# EAGLE board hw4 (EAGLE 9.6.2)
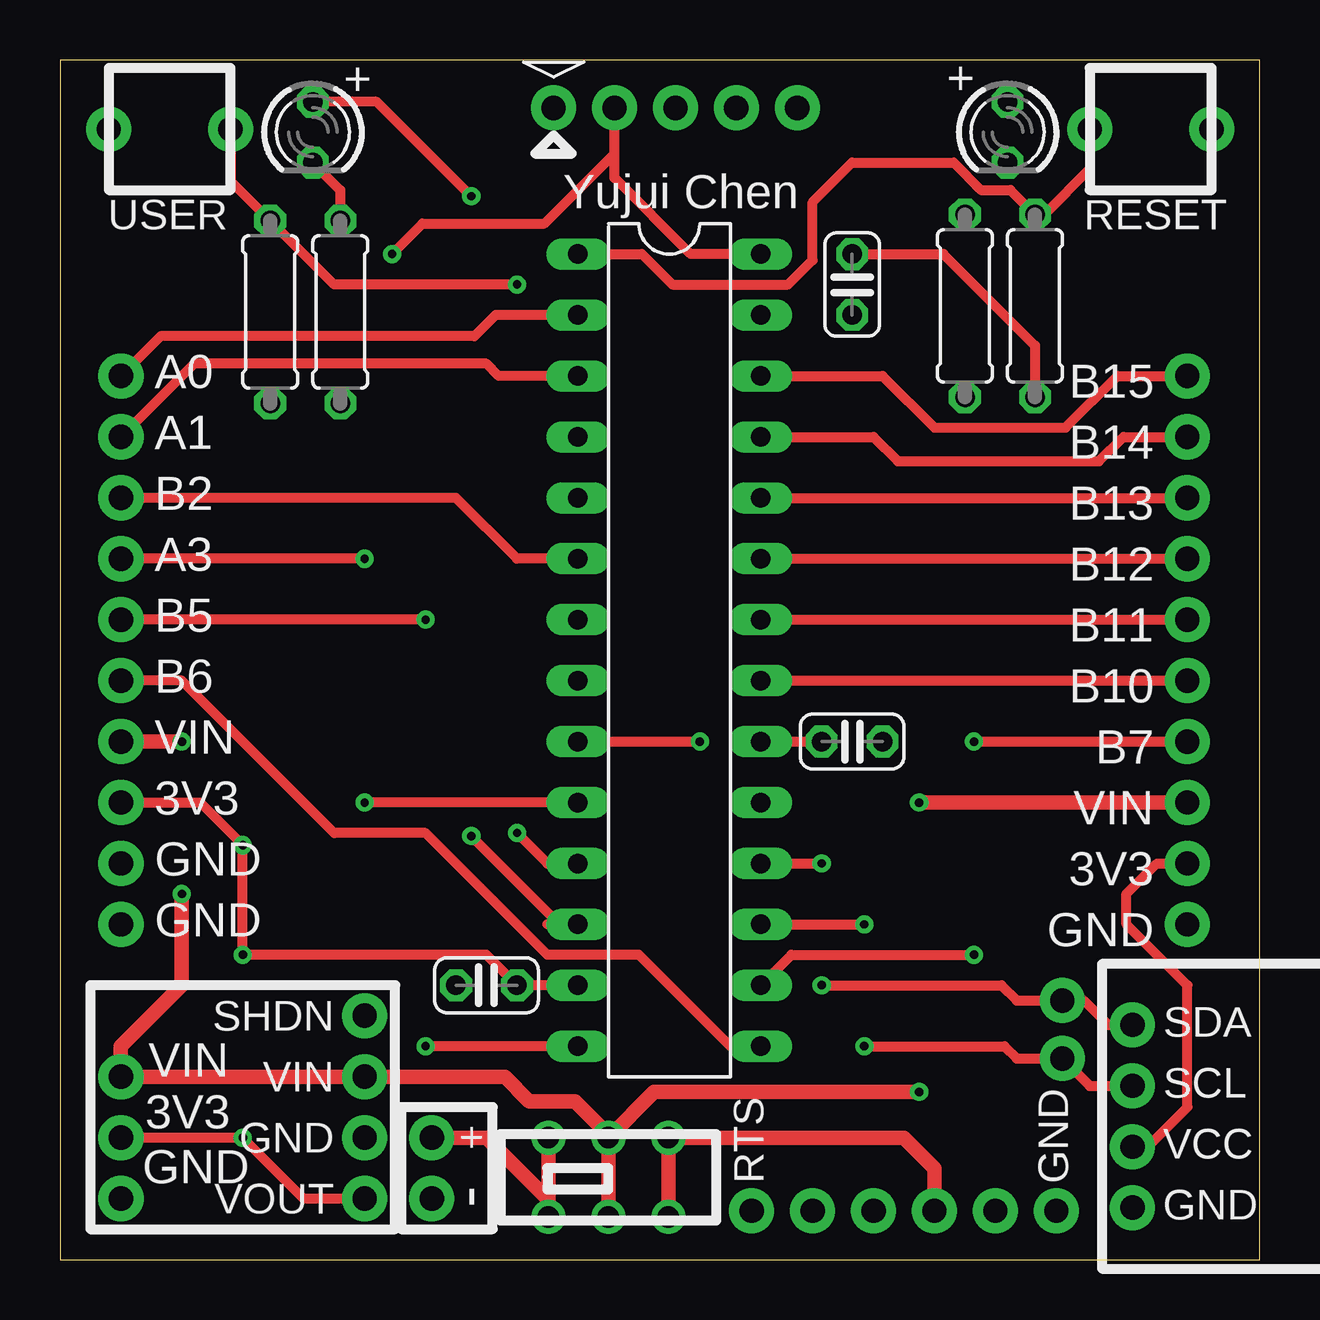
[diagram p0: board, top side]
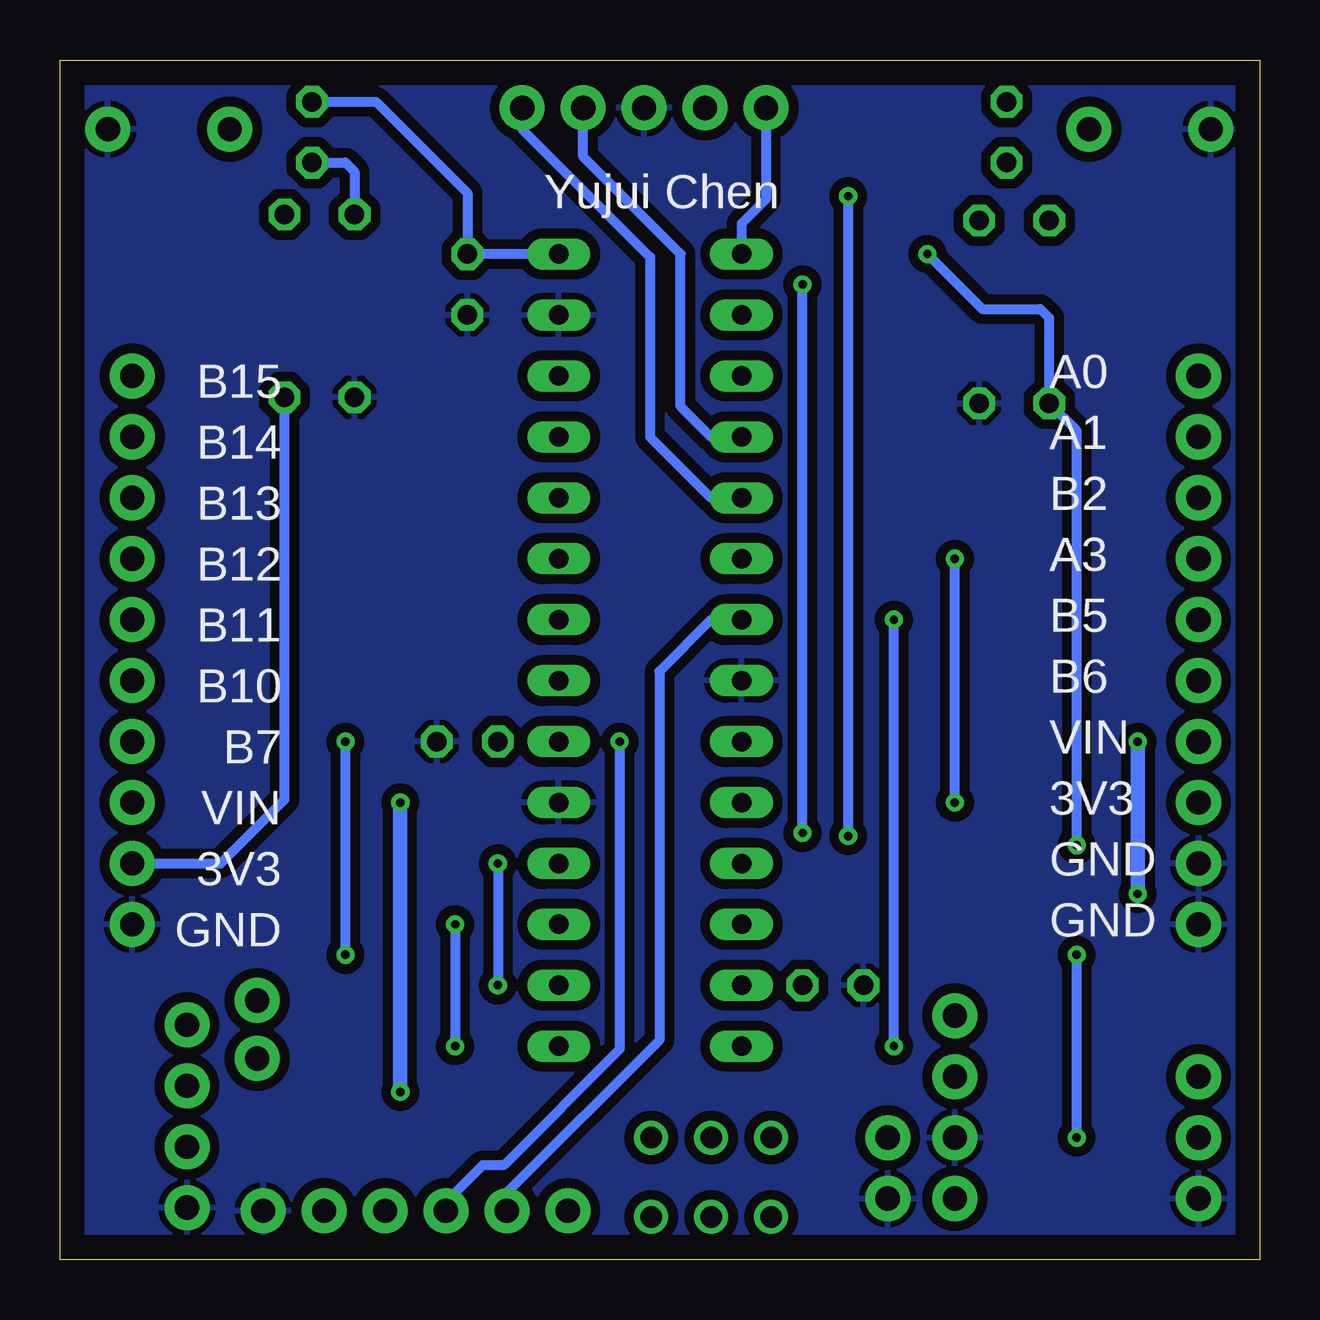
[diagram p1: board, bottom side, seen from below]

Size 50 x 50 mm. Coordinates in mm from the lower left corner, seen from the top.
Outline: 0,0 50,0 50,50 0,50 0,0
Copper layers (1*16): Top 0.035mm / dielectric 1.5mm / Bottom 0.035mm
Design rules "default": minimum track width 6mil, minimum drill 0.35mm, track to track 6mil, track to pad 6mil, pad to pad 6mil, via to via 6mil, smd to smd 6mil, copper to edge 40mil, drill to drill 6mil, minimum pad ring 10mil, minimum via ring 8mil, stop-mask expansion 4mil, vias tented up to drill 0mil, thermal gap 10mil

## Footprints (pad centres in the part's own frame; a part is rotated, then mirrored left to right if it is on the bottom)
C025-024X044 = drill 0.813 octagon: 1 -1.27,0; 2 1.27,0
LED3MM = drill 0.813 octagon: A -1.27,0; K 1.27,0
0207/7 = drill 0.813 octagon: 1 -3.81,0; 2 3.81,0
DIL28-3 = drill 0.813 long: 1 -16.51,-3.81; 2 -13.97,-3.81; 3 -11.43,-3.81; 4 -8.89,-3.81; 5 -6.35,-3.81; 6 -3.81,-3.81; 7 -1.27,-3.81; 8 1.27,-3.81; 9 3.81,-3.81; 10 6.35,-3.81; 11 8.89,-3.81; 12 11.43,-3.81; 13 13.97,-3.81; 14 16.51,-3.81; 15 16.51,3.81; 16 13.97,3.81; 17 11.43,3.81; 18 8.89,3.81; 19 6.35,3.81; 20 3.81,3.81; 21 1.27,3.81; 22 -1.27,3.81; 23 -3.81,3.81; 24 -6.35,3.81; 25 -8.89,3.81; 26 -11.43,3.81; 27 -13.97,3.81; 28 -16.51,3.81
BATTERY = drill 1.016 pad 1.88: 1 -1.27,0; 2 1.27,0
SLIDE = drill 0.9: 1 -2.5,-1.65; 2 0,-1.65; 3 2.5,-1.65; 4 2.5,1.65; 5 0,1.65; 6 -2.5,1.65
VREG = drill 1.016 pad 1.88: 1 -3.81,0; 2 -1.27,0; 3 1.27,0; 4 3.81,0
USBTOUART = drill 1.016 pad 1.88: 1 -6.35,0; 2 -3.81,0; 3 -1.27,0; 4 1.27,0; 5 3.81,0; 6 6.35,0
SNAP = drill 1.016 pad 1.88: 1 -5.08,0; 2 -2.54,0; 3 0,0; 4 2.54,0; 5 5.08,0
DISPLAY = drill 1.016 pad 1.88: 1 0,-3.81; 2 0,-1.27; 3 0,1.27; 4 0,3.81
BUTTON = drill 1.016 pad 1.88: 1 -2.54,0; 2 2.54,0
ONE = drill 1.016 pad 1.88: 1 0,0
FIVE = drill 1.016 pad 1.88: 1 -5.08,0; 2 -2.54,0; 3 0,0; 4 2.54,0; 5 5.08,0

## Placement (x,y rotation side)
C1  0.1uF  [C025-024X044]  33.02,40.64 270 top
C2  10uF  [C025-024X044]  33.02,21.59 0 top
C3  0.1uF  [C025-024X044]  17.78,11.43 180 top
LED1  RED  [LED3MM]  39.5,46.99 270 top
LED2  GREEN  [LED3MM]  10.54,46.99 270 top
R1  330  [0207/7]  37.72,39.75 90 top
R2  330  [0207/7]  11.68,39.5 90 top
R3  10k  [0207/7]  40.64,39.75 270 top
R4  10k  [0207/7]  8.76,39.5 270 top
U$1  PIC32  [DIL28-3]  25.4,25.4 270 top
U$2  BATTERY  [BATTERY]  15.49,3.81 90 top
U$3  SLIDE  [SLIDE]  22.86,3.43 0 top
U$4  VREG  [VREG]  12.7,6.35 90 top
U$5  USBTOUART  [USBTOUART]  35.18,2.03 180 top
U$6  SNAP  [SNAP]  25.65,48.01 0 top
U$7  DISPLAY  [DISPLAY]  44.7,5.97 0 top
U$8  RESET  [BUTTON]  45.47,47.12 0 top
U$9  USER  [BUTTON]  4.57,47.12 180 top
U$10  ONE  [ONE]  41.78,10.79 0 top
U$11  ONE  [ONE]  41.78,8.38 0 top
U$12  FIVE  [FIVE]  46.99,31.75 270 top
U$13  FIVE  [FIVE]  46.99,19.05 270 top
U$14  FIVE  [FIVE]  2.54,19.05 270 top
U$15  FIVE  [FIVE]  2.54,31.75 270 top
U$16  ONE  [ONE]  2.54,7.62 0 top
U$17  ONE  [ONE]  2.54,5.08 0 top
U$18  ONE  [ONE]  2.54,2.54 0 top

## Library data of the parts
C1-C3 = hw4; SPICEPREFIX: C
LED1 LED2 U$1-U$18 = hw4
R1-R4 = hw4; SPICEPREFIX: R

## Nets
+3V3: C1.1 C3.1 LED1.A R3.2 R4.2 U$1.13 U$1.28 U$4.1 U$6.2 U$7.2 U$13.4 U$14.3 U$17.1
+5V: U$3.3 U$3.4 U$5.3
A0: U$1.2 U$15.1
A1: U$1.3 U$15.2
A3: U$1.10 U$15.4
A4: LED2.A U$1.12
B2: U$1.6 U$15.3
B4: R4.1 U$1.11 U$9.1
B5: U$1.14 U$15.5
B6: U$1.15 U$14.1
B7: U$1.16 U$13.2
B10: U$1.21 U$13.1
B11: U$1.22 U$12.5
B12: U$1.23 U$12.4
B13: U$1.24 U$12.3
B14: U$1.25 U$12.2
B15: U$1.26 U$12.1
GND: C1.2 C2.2 C3.2 R1.1 R2.1 U$1.8 U$1.19 U$1.27 U$2.1 U$4.2 U$5.1 U$6.3 U$7.1 U$8.2 U$9.2 U$13.5 U$14.4 U$14.5 U$18.1
MCLR: R3.1 U$1.1 U$6.1 U$8.1
N$1: C2.1 U$1.20
N$2: U$2.2 U$3.1 U$3.6
N$5: LED1.K R1.2
N$6: LED2.K R2.2
PGC: U$1.5 U$6.5
PGD: U$1.4 U$6.4
SCL: U$1.17 U$7.3 U$11.1
SDA: U$1.18 U$7.4 U$10.1
U1RX: U$1.9 U$5.4
U1TX: U$1.7 U$5.5
VIN: U$3.2 U$3.5 U$4.3 U$13.3 U$14.2 U$16.1

## Tracks (layer width: path | path; a pad name or v marks a point on that pad's centre or on a via)
+3V3  (via drill 0.35)
  Top 0.406: U$1.13 C3.1 17.78,12.7 v7.62,12.7 v7.62,17.27 5.84,19.05 U$14.3 | C1.1 36.83,41.91 40.64,38.1 R3.2 | U$7.2 45.34,4.7 46.99,6.35 46.99,11.43 44.45,13.97 44.45,15.24 45.72,16.51 U$13.4 | U$4.1 10.16,2.54 v7.62,5.08 U$17.1 | v13.84,41.91 15.11,43.18 20.19,43.18 23.11,46.1 U$6.2 23.11,45.09 26.29,41.91 U$1.28
  Bottom 0.406: LED1.A 36.83,48.26 33.02,44.45 C1.1 U$1.28 | v7.62,5.08 v7.62,12.7 | v7.62,17.27 7.62,34.54 R4.2 8.76,39.24 9.14,39.62 11.56,39.62 v13.84,41.91 | U$13.4 43.31,16.51 40.64,19.18 R3.2
+5V
  Top 0.61: U$3.3 U$3.4 35.18,5.08 36.45,3.81 U$5.3
A0
  Top 0.406: U$1.2 18.16,39.37 17.27,38.48 4.19,38.48 U$15.1
A1
  Top 0.406: U$1.3 18.29,36.83 17.78,37.34 5.59,37.34 U$15.2
A3  (via drill 0.35)
  Top 0.406: U$1.10 v12.7,19.05 | v12.7,29.21 U$15.4
  Bottom 0.406: v12.7,19.05 v12.7,29.21
A4  (via drill 0.35)
  Top 0.406: 20.32,13.97 U$1.12 20.83,13.97 v17.14,17.65 | v17.14,44.32 13.21,48.26 LED2.A
  Bottom 0.406: v17.14,17.65 v17.14,44.32
B2
  Top 0.406: U$1.6 19.05,29.21 16.51,31.75 U$15.3
B4  (via drill 0.35)
  Top 0.406: U$9.1 7.11,44.96 R4.1 11.43,40.64 v19.05,40.64 | U$1.11 20.32,16.51 v19.05,17.78
  Bottom 0.406: v19.05,17.78 v19.05,40.64
B5  (via drill 0.35)
  Top 0.406: U$1.14 v15.24,8.89 | v15.24,26.67 U$15.5
  Bottom 0.406: v15.24,8.89 v15.24,26.67
B6
  Top 0.406: U$1.15 27.94,8.89 24.13,12.7 20.32,12.7 15.24,17.78 11.43,17.78 5.08,24.13 U$14.1
B7  (via drill 0.35)
  Top 0.406: U$1.16 30.48,12.7 v38.1,12.7 | v38.1,21.59 U$13.2
  Bottom 0.406: v38.1,12.7 v38.1,21.59
B10
  Top 0.406: U$1.21 U$13.1
B11
  Top 0.406: U$1.22 U$12.5
B12
  Top 0.406: U$1.23 U$12.4
B13
  Top 0.406: U$1.24 U$12.3
B14
  Top 0.406: U$12.2 44.32,34.29 43.31,33.27 34.92,33.27 33.91,34.29 U$1.25
B15
  Top 0.406: U$1.26 34.29,36.83 36.45,34.67 41.91,34.67 44.07,36.83 U$12.1
GND
  pour Bottom (isolate 0.406): 0,0 50.8,0 50.8,50.8 0,50.8
MCLR
  Top 0.406: U$8.1 42.93,45.47 41.02,43.56 R3.1 39.62,44.58 38.39,44.58 37.25,45.72 33.02,45.72 31.37,44.07 31.37,41.66 30.35,40.64 25.53,40.64 24.26,41.91 U$1.1 21.84,41.91
  Bottom 0.406: U$6.1 20.57,44.2 21.59,43.18 U$1.1
N$1
  Top 0.406: U$1.20 C2.1
N$2
  Top 0.61: U$3.6 U$3.1 20.36,2.5 17.78,5.08 U$2.2
N$5
  Bottom 0.406: LED1.K 38.1,45.72 37.72,45.34 R1.2
N$6
  Top 0.406: LED2.K 11.68,44.58 R2.2
PGC
  Bottom 0.406: U$6.5 30.73,47.12 25.4,41.78 25.4,34.29 22.86,31.75 U$1.5
PGD
  Bottom 0.406: U$6.4 28.19,45.97 24.13,41.91 24.13,35.56 22.86,34.29 U$1.4
SCL  (via drill 0.35)
  Top 0.406: U$7.3 42.93,7.24 U$11.1 39.88,8.38 39.37,8.89 v33.53,8.89 | U$1.17 v33.53,13.97
  Bottom 0.406: v33.53,13.97 v33.53,8.89
SDA  (via drill 0.35)
  Top 0.406: U$1.18 v31.75,16.51 | v31.75,11.43 39.24,11.43 39.88,10.79 U$10.1 42.67,10.79 43.69,9.78 U$7.4
  Bottom 0.406: v31.75,16.51 v31.75,11.43
U1RX  (via drill 0.35)
  Top 0.406: U$1.9 v26.67,21.59
  Bottom 0.406: v26.67,21.59 26.67,8.76 31.5,3.94 32.38,3.94 33.91,2.41 U$5.4
U1TX
  Bottom 0.406: U$1.7 22.86,26.67 25.02,24.51 25.02,9.14 31.37,2.79 U$5.5
VIN  (via drill 0.35)
  Top 0.61: U$3.5 U$3.2 | U$3.5 22.86,5.21 21.46,6.6 19.56,6.6 18.54,7.62 U$4.3 U$16.1 2.54,8.89 5.08,11.43 v5.08,15.24 | U$3.5 24.77,6.99 34.29,6.99 34.54,6.99 v35.81,6.99 | U$14.2 v5.08,21.59 | v35.81,19.05 U$13.3
  Bottom 0.61: v5.08,21.59 v5.08,15.24 | v35.81,6.99 v35.81,19.05

## Text on the board
tPlace: + | + | Yujui Chen | B15 | A0 | B14 | A1 | B13 | B2 | B12 | A3 | B11 | B5 | B10 | B6 | B7 | VIN | VIN | 3V3 | 3V3 | GND | GND | GND | VIN | 3V3 | GND
bPlace: Yujui Chen | B15 | A0 | B14 | A1 | B13 | B2 | B12 | A3 | B11 | B5 | B10 | B6 | B7 | VIN | VIN | 3V3 | 3V3 | GND | GND | GND